# EAGLE board LEDSync (EAGLE 8.3.2)
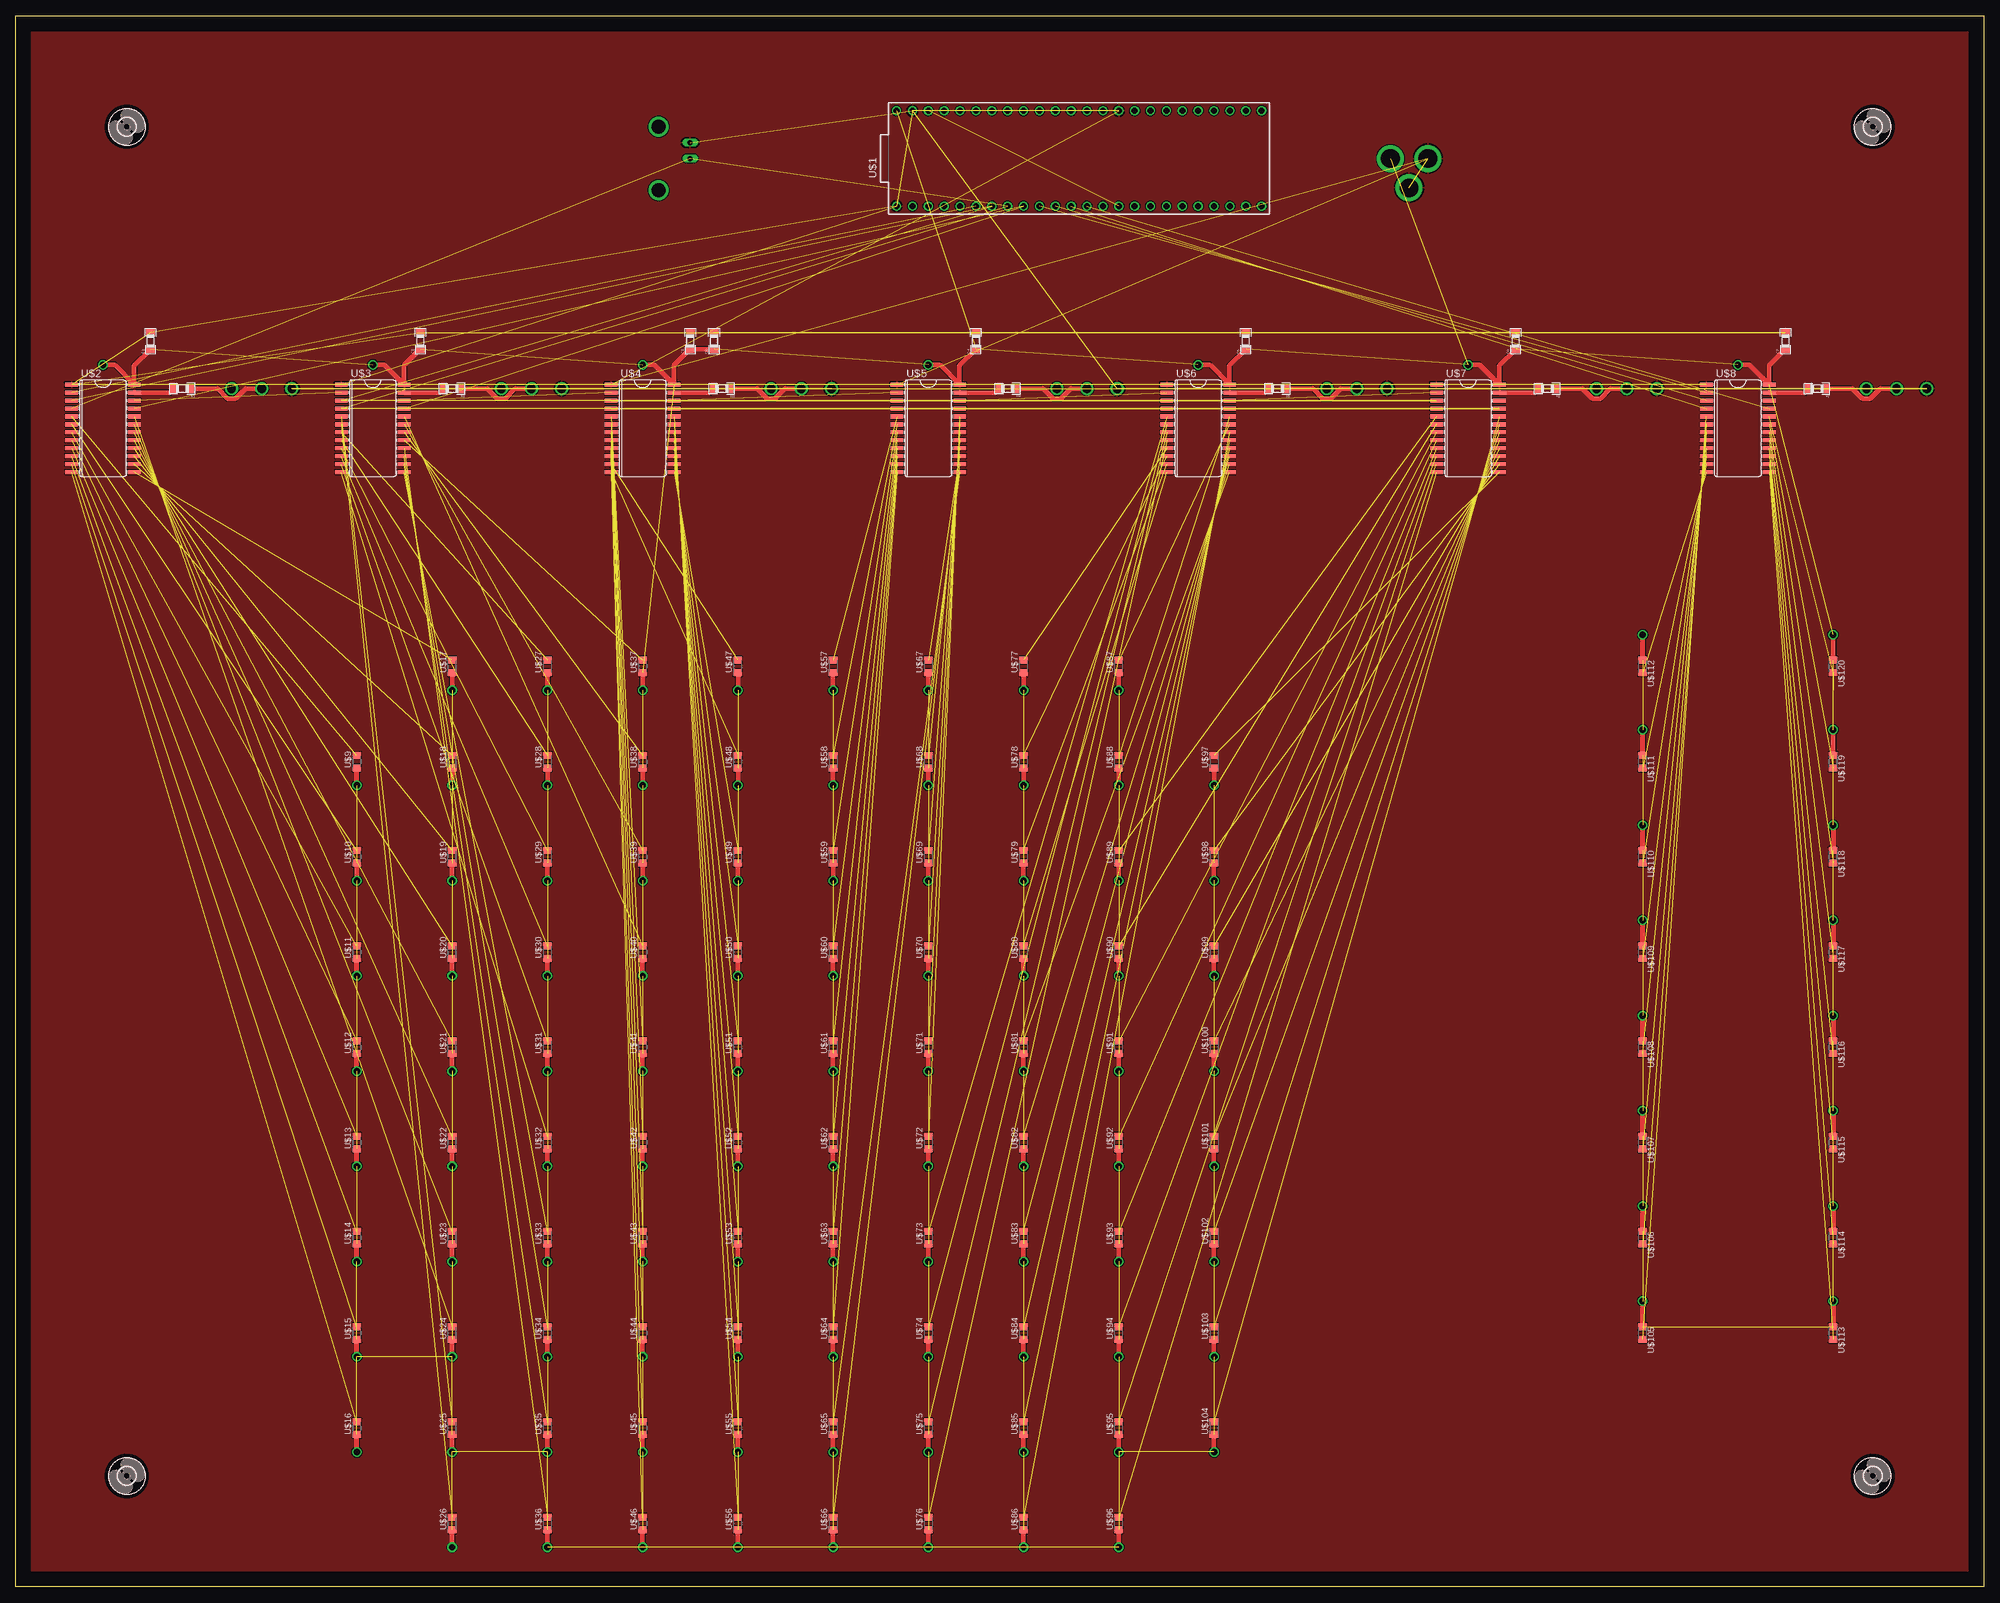
[diagram p0: board, top side]
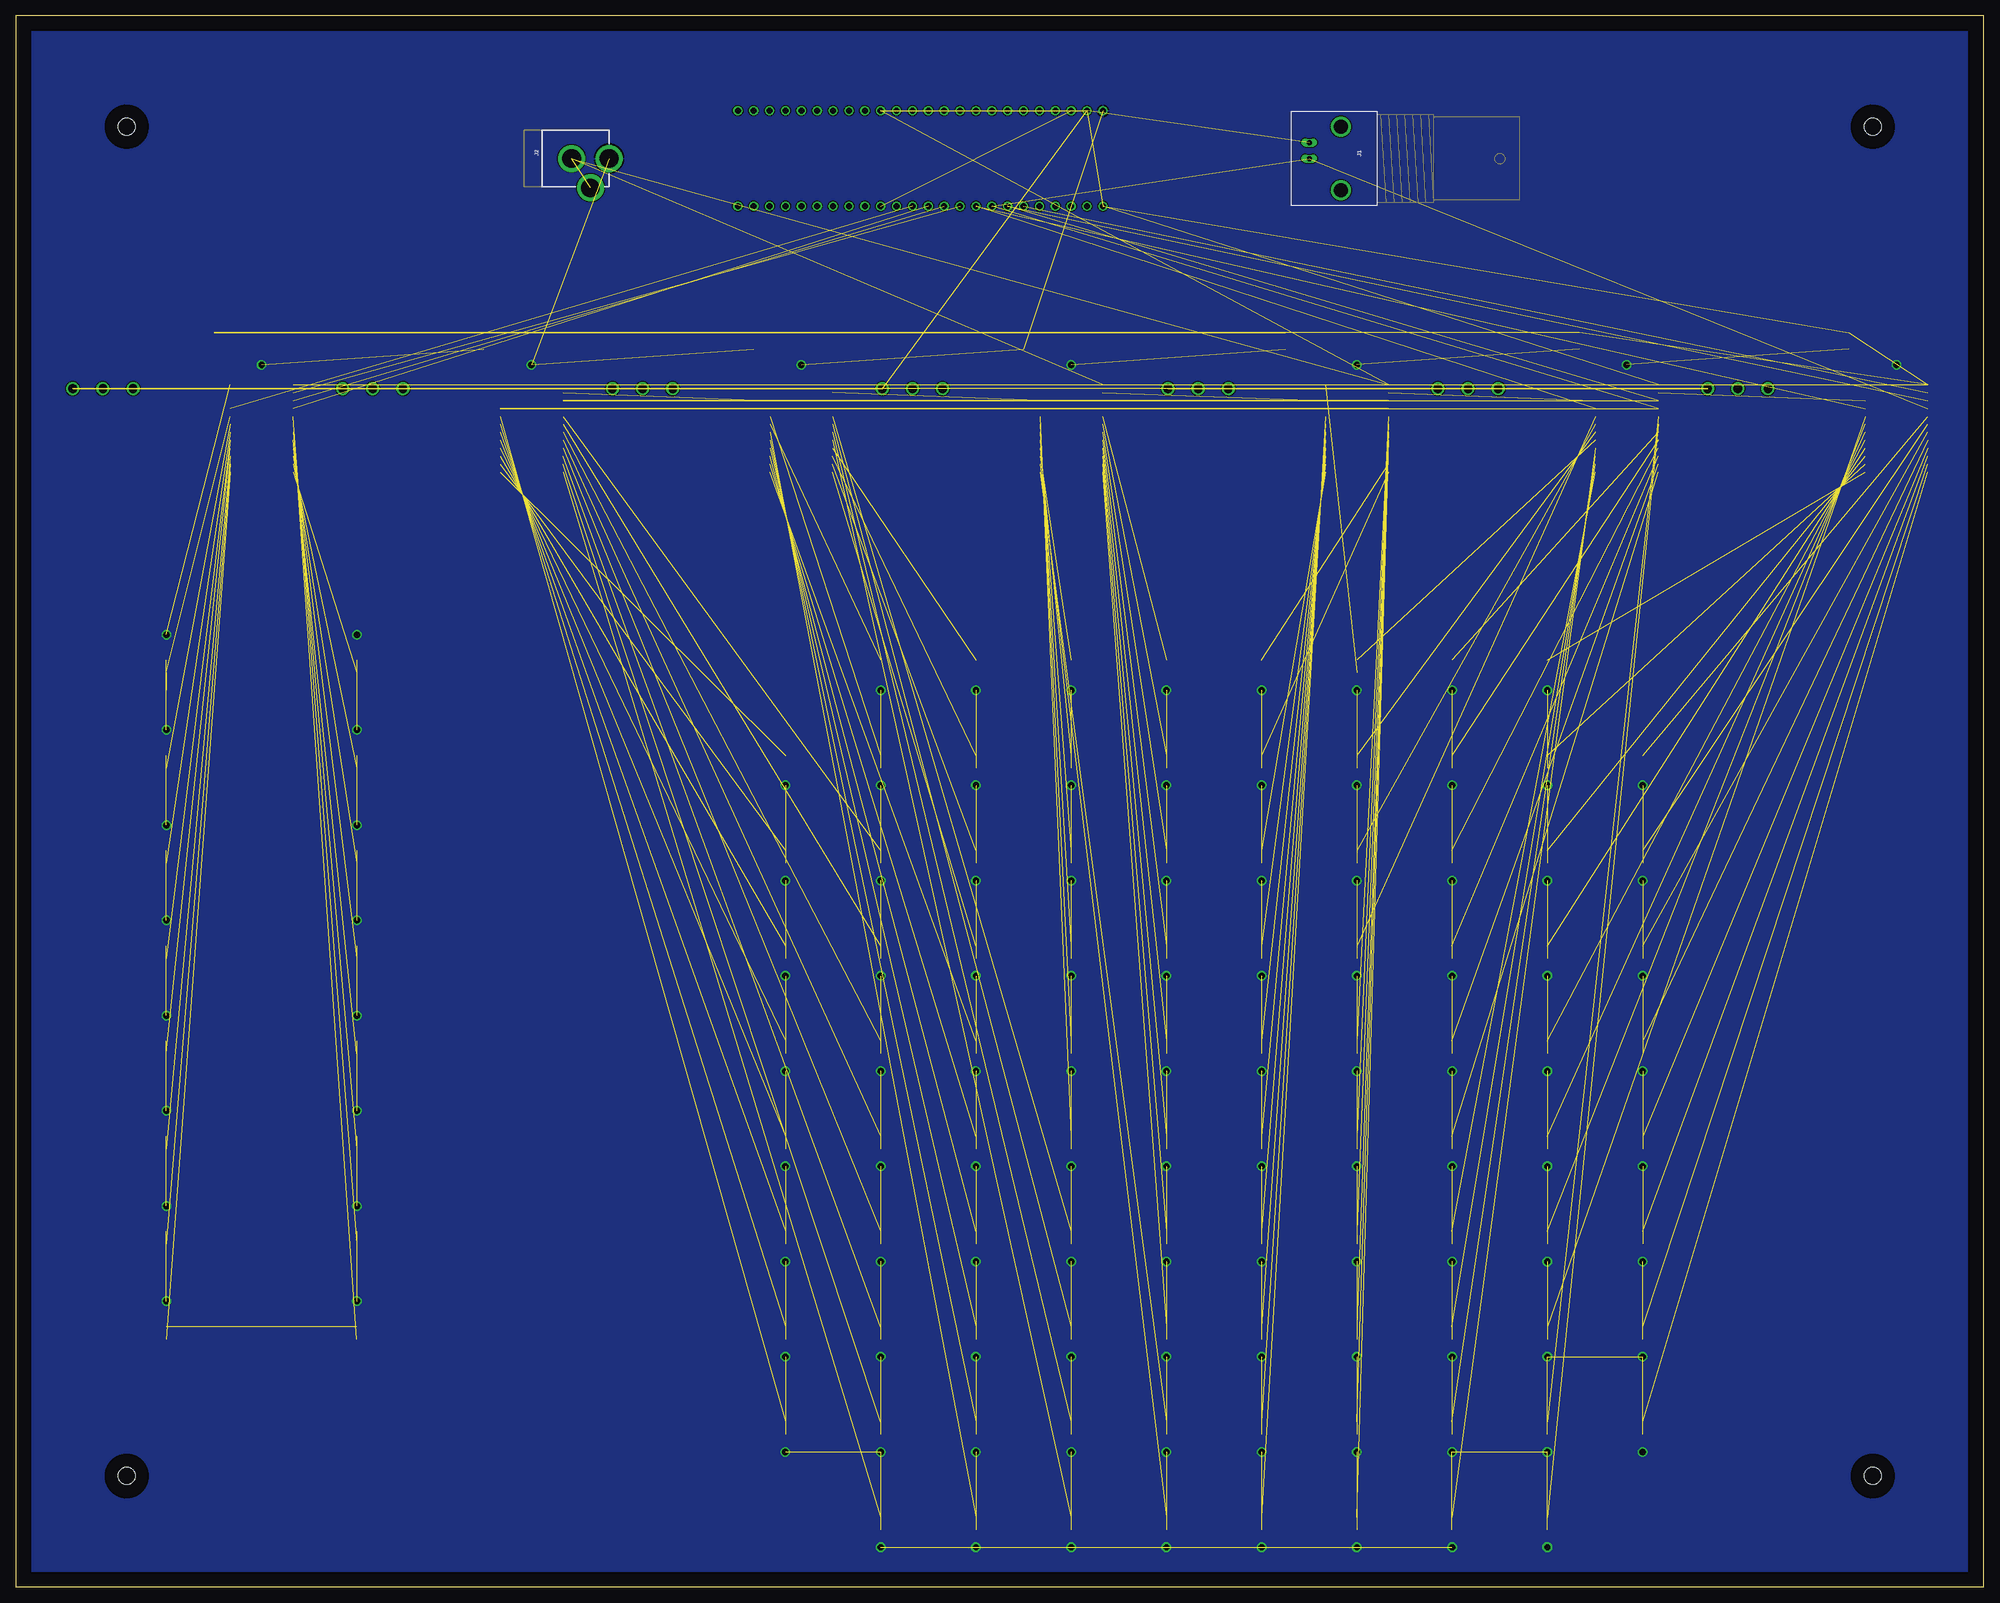
[diagram p1: board, bottom side, seen from below]

Size 314.96 x 251.46 mm. Coordinates in mm from the lower left corner, seen from the top.
Outline: 0,251.46 314.96,251.46 314.96,0 0,0 0,251.46
Copper layers (1*16): Top 0.035mm / dielectric 1.5mm / Bottom 0.035mm
Design rules "default": minimum track width 6mil, minimum drill 0.35mm, track to track 6mil, track to pad 6mil, pad to pad 6mil, via to via 6mil, smd to smd 6mil, copper to edge 40mil, drill to drill 6mil, minimum pad ring 10mil, minimum via ring 8mil, stop-mask expansion 4mil, vias tented up to drill 0mil, thermal gap 10mil

## Footprints (pad centres in the part's own frame; a part is rotated, then mirrored left to right if it is on the bottom)
0805 = smd 1.2 x 1.4: 1 -1.3,0; 2 1.3,0
2,8 = hole 2.8: 0,0
BNC = drill 2.2: 3 -5.08,5.08; 4 5.08,5.08 | drill 0.8 long: GND -2.54,0; S 0,0
POWER_JACK_PTH = drill 2.997 pad 4.318: GND 0,7.7; GNDBREAK 4.7,10.7; PWR 0,13.7
TEENSY_3.6_DIL = drill 0.965: 0 -7.62,25.4; 1 -7.62,22.86; 2 -7.62,20.32; 3 -7.62,17.78; 3.3V 7.62,22.86; 3.3V3 -7.62,-7.62; 4 -7.62,15.24; 5 -7.62,12.7; 6 -7.62,10.16; 7 -7.62,7.62; 8 -7.62,5.08; 9 -7.62,2.54; 10 -7.62,0; 11 -7.62,-2.54; 12 -7.62,-5.08; 13 7.62,-5.08; 14/A0 7.62,-2.54; 15/A1 7.62,0; 16/A2 7.62,2.54; 17/A3 7.62,5.08; 18/A4 7.62,7.62; 19/A5 7.62,10.16; 20/A6 7.62,12.7; 21/A7 7.62,15.24; 22/A8 7.62,17.78; 23/A9 7.62,20.32; 24 -7.62,-10.16; 25 -7.62,-12.7; 26 -7.62,-15.24; 27 -7.62,-17.78; 28 -7.62,-20.32; 29 -7.62,-22.86; 30 -7.62,-25.4; 31/A12 -7.62,-27.94; 32/A13 -7.62,-30.48; 33/A14 7.62,-30.48; 34/A15 7.62,-27.94; 35/A16 7.62,-25.4; 36/A17 7.62,-22.86; 37/A18 7.62,-20.32; 38/A19 7.62,-17.78; 39/A20 7.62,-15.24; A21 7.62,-12.7; A22 7.62,-10.16; AGND 7.62,25.4; GND -7.62,27.94; GND1 7.62,-7.62; VIN 7.62,27.94
SO24L = smd 0.66 x 2.032: 1 -6.985,-5.029; 2 -5.715,-5.029; 3 -4.445,-5.029; 4 -3.175,-5.029; 5 -1.905,-5.029; 6 -0.635,-5.029; 7 0.635,-5.029; 8 1.905,-5.029; 9 3.175,-5.029; 10 4.445,-5.029; 11 5.715,-5.029; 12 6.985,-5.029; 13 6.985,5.029; 14 5.715,5.029; 15 4.445,5.029; 16 3.175,5.029; 17 1.905,5.029; 18 0.635,5.029; 19 -0.635,5.029; 20 -1.905,5.029; 21 -3.175,5.029; 22 -4.445,5.029; 23 -5.715,5.029; 24 -6.985,5.029
0805' = smd 1.1 x 1.4: 1 -1,0; 2 1,0
P170N2 = drill 1.397: P$1 4.826,0; P$2 0,0; P$3 -4.826,0

## Placement (x,y rotation side)
C1  0.1uF  [0805]  21.59,199.39 90 top
C2  0.1uF  [0805]  64.77,199.39 90 top
C3  0.1uF  [0805]  107.95,199.39 90 top
C4  0.1uF  [0805]  153.67,199.39 90 top
C5  0.1uF  [0805]  196.85,199.39 90 top
C6  0.1uF  [0805]  240.03,199.39 90 top
C7  0.1uF  [0805]  283.21,199.39 90 top
C8  4.7uF  [0805]  111.76,199.39 90 top
H1  MOUNT-HOLE2.8  [2,8]  17.78,233.68 0 top
H2  MOUNT-HOLE2.8  [2,8]  297.18,233.68 0 top
H3  MOUNT-HOLE2.8  [2,8]  297.18,17.78 0 top
H4  MOUNT-HOLE2.8  [2,8]  17.78,17.78 0 top
J1  BNCPTH  [BNC]  107.95,228.6 270 bottom
J2  POWER_JACK  [POWER_JACK_PTH]  233.68,228.6 270 bottom
R1  [0805]  26.67,191.77 180 top
R2  [0805]  69.85,191.77 180 top
R3  [0805]  113.03,191.77 180 top
R4  [0805]  158.75,191.77 180 top
R5  [0805]  201.93,191.77 180 top
R6  [0805]  245.11,191.77 180 top
R7  [0805]  288.29,191.77 180 top
U$1  TEENSY_3.6_DIL  [TEENSY_3.6_DIL]  168.91,228.6 90 top
U$2  MAX6969AWG+AWG+  [SO24L]  13.97,185.42 270 top
U$3  MAX6969AWG+AWG+  [SO24L]  57.15,185.42 270 top
U$4  MAX6969AWG+AWG+  [SO24L]  100.33,185.42 270 top
U$5  MAX6969AWG+AWG+  [SO24L]  146.05,185.42 270 top
U$6  MAX6969AWG+AWG+  [SO24L]  189.23,185.42 270 top
U$7  MAX6969AWG+AWG+  [SO24L]  232.41,185.42 270 top
U$8  MAX6969AWG+AWG+  [SO24L]  275.59,185.42 270 top
U$9  LED0805  [0805']  54.61,132.08 90 top
U$10  LED0805  [0805']  54.61,116.84 90 top
U$11  LED0805  [0805']  54.61,101.6 90 top
U$12  LED0805  [0805']  54.61,86.36 90 top
U$13  LED0805  [0805']  54.61,71.12 90 top
U$14  LED0805  [0805']  54.61,55.88 90 top
U$15  LED0805  [0805']  54.61,40.64 90 top
U$16  LED0805  [0805']  54.61,25.4 90 top
U$17  LED0805  [0805']  69.85,147.32 90 top
U$18  LED0805  [0805']  69.85,132.08 90 top
U$19  LED0805  [0805']  69.85,116.84 90 top
U$20  LED0805  [0805']  69.85,101.6 90 top
U$21  LED0805  [0805']  69.85,86.36 90 top
U$22  LED0805  [0805']  69.85,71.12 90 top
U$23  LED0805  [0805']  69.85,55.88 90 top
U$24  LED0805  [0805']  69.85,40.64 90 top
U$25  LED0805  [0805']  69.85,25.4 90 top
U$26  LED0805  [0805']  69.85,10.16 90 top
U$27  LED0805  [0805']  85.09,147.32 90 top
U$28  LED0805  [0805']  85.09,132.08 90 top
U$29  LED0805  [0805']  85.09,116.84 90 top
U$30  LED0805  [0805']  85.09,101.6 90 top
U$31  LED0805  [0805']  85.09,86.36 90 top
U$32  LED0805  [0805']  85.09,71.12 90 top
U$33  LED0805  [0805']  85.09,55.88 90 top
U$34  LED0805  [0805']  85.09,40.64 90 top
U$35  LED0805  [0805']  85.09,25.4 90 top
U$36  LED0805  [0805']  85.09,10.16 90 top
U$37  LED0805  [0805']  100.33,147.32 90 top
U$38  LED0805  [0805']  100.33,132.08 90 top
U$39  LED0805  [0805']  100.33,116.84 90 top
U$40  LED0805  [0805']  100.33,101.6 90 top
U$41  LED0805  [0805']  100.33,86.36 90 top
U$42  LED0805  [0805']  100.33,71.12 90 top
U$43  LED0805  [0805']  100.33,55.88 90 top
U$44  LED0805  [0805']  100.33,40.64 90 top
U$45  LED0805  [0805']  100.33,25.4 90 top
U$46  LED0805  [0805']  100.33,10.16 90 top
U$47  LED0805  [0805']  115.57,147.32 90 top
U$48  LED0805  [0805']  115.57,132.08 90 top
U$49  LED0805  [0805']  115.57,116.84 90 top
U$50  LED0805  [0805']  115.57,101.6 90 top
U$51  LED0805  [0805']  115.57,86.36 90 top
U$52  LED0805  [0805']  115.57,71.12 90 top
U$53  LED0805  [0805']  115.57,55.88 90 top
U$54  LED0805  [0805']  115.57,40.64 90 top
U$55  LED0805  [0805']  115.57,25.4 90 top
U$56  LED0805  [0805']  115.57,10.16 90 top
U$57  LED0805  [0805']  130.81,147.32 90 top
U$58  LED0805  [0805']  130.81,132.08 90 top
U$59  LED0805  [0805']  130.81,116.84 90 top
U$60  LED0805  [0805']  130.81,101.6 90 top
U$61  LED0805  [0805']  130.81,86.36 90 top
U$62  LED0805  [0805']  130.81,71.12 90 top
U$63  LED0805  [0805']  130.81,55.88 90 top
U$64  LED0805  [0805']  130.81,40.64 90 top
U$65  LED0805  [0805']  130.81,25.4 90 top
U$66  LED0805  [0805']  130.81,10.16 90 top
U$67  LED0805  [0805']  146.05,147.32 90 top
U$68  LED0805  [0805']  146.05,132.08 90 top
U$69  LED0805  [0805']  146.05,116.84 90 top
U$70  LED0805  [0805']  146.05,101.6 90 top
U$71  LED0805  [0805']  146.05,86.36 90 top
U$72  LED0805  [0805']  146.05,71.12 90 top
U$73  LED0805  [0805']  146.05,55.88 90 top
U$74  LED0805  [0805']  146.05,40.64 90 top
U$75  LED0805  [0805']  146.05,25.4 90 top
U$76  LED0805  [0805']  146.05,10.16 90 top
U$77  LED0805  [0805']  161.29,147.32 90 top
U$78  LED0805  [0805']  161.29,132.08 90 top
U$79  LED0805  [0805']  161.29,116.84 90 top
U$80  LED0805  [0805']  161.29,101.6 90 top
U$81  LED0805  [0805']  161.29,86.36 90 top
U$82  LED0805  [0805']  161.29,71.12 90 top
U$83  LED0805  [0805']  161.29,55.88 90 top
U$84  LED0805  [0805']  161.29,40.64 90 top
U$85  LED0805  [0805']  161.29,25.4 90 top
U$86  LED0805  [0805']  161.29,10.16 90 top
U$87  LED0805  [0805']  176.53,147.32 90 top
U$88  LED0805  [0805']  176.53,132.08 90 top
U$89  LED0805  [0805']  176.53,116.84 90 top
U$90  LED0805  [0805']  176.53,101.6 90 top
U$91  LED0805  [0805']  176.53,86.36 90 top
U$92  LED0805  [0805']  176.53,71.12 90 top
U$93  LED0805  [0805']  176.53,55.88 90 top
U$94  LED0805  [0805']  176.53,40.64 90 top
U$95  LED0805  [0805']  176.53,25.4 90 top
U$96  LED0805  [0805']  176.53,10.16 90 top
U$97  LED0805  [0805']  191.77,132.08 90 top
U$98  LED0805  [0805']  191.77,116.84 90 top
U$99  LED0805  [0805']  191.77,101.6 90 top
U$100  LED0805  [0805']  191.77,86.36 90 top
U$101  LED0805  [0805']  191.77,71.12 90 top
U$102  LED0805  [0805']  191.77,55.88 90 top
U$103  LED0805  [0805']  191.77,40.64 90 top
U$104  LED0805  [0805']  191.77,25.4 90 top
U$105  LED0805  [0805']  260.35,40.64 270 top
U$106  LED0805  [0805']  260.35,55.88 270 top
U$107  LED0805  [0805']  260.35,71.12 270 top
U$108  LED0805  [0805']  260.35,86.36 270 top
U$109  LED0805  [0805']  260.35,101.6 270 top
U$110  LED0805  [0805']  260.35,116.84 270 top
U$111  LED0805  [0805']  260.35,132.08 270 top
U$112  LED0805  [0805']  260.35,147.32 270 top
U$113  LED0805  [0805']  290.83,40.64 270 top
U$114  LED0805  [0805']  290.83,55.88 270 top
U$115  LED0805  [0805']  290.83,71.12 270 top
U$116  LED0805  [0805']  290.83,86.36 270 top
U$117  LED0805  [0805']  290.83,101.6 270 top
U$118  LED0805  [0805']  290.83,116.84 270 top
U$119  LED0805  [0805']  290.83,132.08 270 top
U$120  LED0805  [0805']  290.83,147.32 270 top
U$121  P170N2  [P170N2]  39.37,191.77 180 top
U$122  P170N2  [P170N2]  82.55,191.77 180 top
U$123  P170N2  [P170N2]  125.73,191.77 180 top
U$124  P170N2  [P170N2]  171.45,191.77 180 top
U$125  P170N2  [P170N2]  214.63,191.77 180 top
U$126  P170N2  [P170N2]  257.81,191.77 180 top
U$127  P170N2  [P170N2]  300.99,191.77 180 top

## Library data of the parts
C1-C8 R1-R7 = standardparts
H1-H4 = holes
J1 = SparkFun-Connectors; PROD_ID: LPA-12729; SF_ID: PRT-10550
J2 = SparkFun-Connectors; PROD_ID: CONN-08197
U$1-U$127 = radu-eagle-lib

## Nets
3V3: U$1.3.3V U$1.3.3V3
G_CLK: U$1.5 U$2.3 U$3.3 U$4.3 U$5.3 U$6.3 U$7.3
G_D: U$1.4 U$2.2
G_LE: J1.S U$1.6 U$2.4 U$3.4 U$4.4 U$5.4 U$6.4 U$7.4
G_OE: U$1.7 U$2.21 U$3.21 U$4.21 U$5.21 U$6.21 U$7.21
GND: C1.2 C2.2 C3.2 C4.2 C5.2 C6.2 C7.2 C8.2 J1.GND J2.GND J2.GNDBREAK U$1.AGND U$1.GND U$1.GND1 U$2.1 U$3.1 U$4.1 U$5.1 U$6.1 U$7.1 U$8.1 U$121.P$3 U$122.P$3 U$123.P$3 U$124.P$3 U$125.P$3 U$126.P$3 U$127.P$3
N$1: U$2.5 U$9.2
N$2: U$2.6 U$10.2
N$3: U$2.7 U$11.2
N$4: U$2.8 U$12.2
N$5: U$2.9 U$13.2
N$6: U$2.10 U$14.2
N$7: U$2.11 U$15.2
N$8: U$2.12 U$16.2
N$9: U$2.13 U$17.2
N$10: U$2.14 U$18.2
N$11: U$2.15 U$19.2
N$12: U$2.16 U$20.2
N$13: U$2.17 U$21.2
N$14: U$2.18 U$22.2
N$15: U$2.19 U$23.2
N$16: U$2.20 U$24.2
N$17: U$3.5 U$25.2
N$18: U$3.6 U$26.2
N$19: U$3.7 U$27.2
N$20: U$3.8 U$28.2
N$21: U$3.9 U$29.2
N$22: U$3.10 U$30.2
N$23: U$3.11 U$31.2
N$24: U$3.12 U$32.2
N$25: U$3.13 U$33.2
N$26: U$3.14 U$34.2
N$27: U$3.15 U$35.2
N$28: U$3.16 U$36.2
N$29: U$3.17 U$37.2
N$30: U$3.18 U$38.2
N$31: U$3.19 U$39.2
N$32: U$3.20 U$40.2
N$33: U$4.5 U$41.2
N$34: U$4.6 U$42.2
N$35: U$4.7 U$43.2
N$36: U$4.8 U$44.2
N$37: U$4.9 U$45.2
N$38: U$4.10 U$46.2
N$39: U$4.11 U$47.2
N$40: U$4.12 U$48.2
N$41: U$4.13 U$49.2
N$42: U$4.14 U$50.2
N$43: U$4.15 U$51.2
N$44: U$4.16 U$52.2
N$45: U$4.17 U$53.2
N$46: U$4.18 U$54.2
N$47: U$4.19 U$55.2
N$48: U$4.20 U$56.2
N$49: U$5.5 U$57.2
N$50: U$5.6 U$58.2
N$51: U$5.7 U$59.2
N$52: U$5.8 U$60.2
N$53: U$5.9 U$61.2
N$54: U$5.10 U$62.2
N$55: U$5.11 U$63.2
N$56: U$5.12 U$64.2
N$57: U$5.13 U$65.2
N$58: U$5.14 U$66.2
N$59: U$5.15 U$67.2
N$60: U$5.16 U$68.2
N$61: U$5.17 U$69.2
N$62: U$5.18 U$70.2
N$63: U$5.19 U$71.2
N$64: U$5.20 U$72.2
N$65: U$6.5 U$73.2
N$66: U$6.6 U$74.2
N$67: U$6.7 U$75.2
N$68: U$6.8 U$76.2
N$69: U$6.9 U$77.2
N$70: U$6.10 U$78.2
N$71: U$6.11 U$79.2
N$72: U$6.12 U$80.2
N$73: U$6.13 U$81.2
N$74: U$6.14 U$82.2
N$75: U$6.15 U$83.2
N$76: U$6.16 U$84.2
N$77: U$6.17 U$85.2
N$78: U$6.18 U$86.2
N$79: U$6.19 U$87.2
N$80: U$6.20 U$88.2
N$81: U$7.5 U$89.2
N$82: U$7.6 U$90.2
N$83: U$7.7 U$91.2
N$84: U$7.8 U$92.2
N$85: U$7.9 U$93.2
N$86: U$7.10 U$94.2
N$87: U$7.11 U$95.2
N$88: U$7.12 U$96.2
N$89: U$7.13 U$97.2
N$90: U$7.14 U$98.2
N$91: U$7.16 U$100.2
N$92: U$7.17 U$101.2
N$93: U$7.18 U$102.2
N$94: U$7.19 U$103.2
N$95: U$7.20 U$104.2
N$96: U$8.5 U$105.2
N$97: U$8.6 U$106.2
N$98: U$8.7 U$107.2
N$99: U$8.8 U$108.2
N$100: U$8.10 U$110.2
N$101: U$8.11 U$111.2
N$102: U$8.12 U$112.2
N$103: U$8.13 U$113.2
N$104: U$8.14 U$114.2
N$105: U$8.15 U$115.2
N$106: U$8.16 U$116.2
N$107: U$8.17 U$117.2
N$108: U$8.18 U$118.2
N$109: U$8.19 U$119.2
N$110: U$8.20 U$120.2
N$111: U$8.9 U$109.2
N$112: U$7.15 U$99.2
N$116: R1.2 U$2.23
N$117: R2.2 U$3.23
N$118: R3.2 U$4.23
N$119: R4.2 U$5.23
N$120: R5.2 U$6.23
N$125: R6.2 U$7.23
N$126: R7.2 U$8.23
N$127: R7.1 U$127.P$2
N$128: U$2.22 U$3.2
N$130: R1.1 U$121.P$2
N$132: R2.1 U$122.P$2
N$134: R3.1 U$123.P$2
N$136: R6.1 U$126.P$2
N$138: R5.1 U$125.P$2
N$140: R4.1 U$124.P$2
N$146: U$3.22 U$4.2
N$147: U$4.22 U$5.2
N$148: U$5.22 U$6.2
N$149: U$6.22 U$7.2
T_CLK: U$1.9 U$8.3
T_D: U$1.8 U$8.2
T_LE: U$1.10 U$8.4
T_OE: U$1.11 U$8.21
VIN: C1.1 C2.1 C3.1 C4.1 C5.1 C6.1 C7.1 C8.1 J2.PWR U$1.VIN U$2.24 U$3.24 U$4.24 U$5.24 U$6.24 U$7.24 U$8.24 U$9.1 U$10.1 U$11.1 U$12.1 U$13.1 U$14.1 U$15.1 U$16.1 U$17.1 U$18.1 U$19.1 U$20.1 U$21.1 U$22.1 U$23.1 U$24.1 U$25.1 U$26.1 U$27.1 U$28.1 U$29.1 U$30.1 U$31.1 U$32.1 U$33.1 U$34.1 U$35.1 U$36.1 U$37.1 U$38.1 U$39.1 U$40.1 U$41.1 U$42.1 U$43.1 U$44.1 U$45.1 U$46.1 U$47.1 U$48.1 U$49.1 U$50.1 U$51.1 U$52.1 U$53.1 U$54.1 U$55.1 U$56.1 U$57.1 U$58.1 U$59.1 U$60.1 U$61.1 U$62.1 U$63.1 U$64.1 U$65.1 U$66.1 U$67.1 U$68.1 U$69.1 U$70.1 U$71.1 U$72.1 U$73.1 U$74.1 U$75.1 U$76.1 U$77.1 U$78.1 U$79.1 U$80.1 U$81.1 U$82.1 U$83.1 U$84.1 U$85.1 U$86.1 U$87.1 U$88.1 U$89.1 U$90.1 U$91.1 U$92.1 U$93.1 U$94.1 U$95.1 U$96.1 U$97.1 U$98.1 U$99.1 U$100.1 U$101.1 U$102.1 U$103.1 U$104.1 U$105.1 U$106.1 U$107.1 U$108.1 U$109.1 U$110.1 U$111.1 U$112.1 U$113.1 U$114.1 U$115.1 U$116.1 U$117.1 U$118.1 U$119.1 U$120.1

## Tracks (layer width: path | path; a pad name or v marks a point on that pad's centre or on a via)
3V3  (1 unrouted)
G_CLK  (6 unrouted)
G_D  (1 unrouted)
G_LE  (7 unrouted)
G_OE  (6 unrouted)
GND  (27 unrouted)
  pour Top: 2.54,248.92 312.42,248.92 312.42,2.54 2.54,2.54
N$1  (1 unrouted)
N$2  (1 unrouted)
N$3  (1 unrouted)
N$4  (1 unrouted)
N$5  (1 unrouted)
N$6  (1 unrouted)
N$7  (1 unrouted)
N$8  (1 unrouted)
N$9  (1 unrouted)
N$10  (1 unrouted)
N$11  (1 unrouted)
N$12  (1 unrouted)
N$13  (1 unrouted)
N$14  (1 unrouted)
N$15  (1 unrouted)
N$16  (1 unrouted)
N$17  (1 unrouted)
N$18  (1 unrouted)
N$19  (1 unrouted)
N$20  (1 unrouted)
N$21  (1 unrouted)
N$22  (1 unrouted)
N$23  (1 unrouted)
N$24  (1 unrouted)
N$25  (1 unrouted)
N$26  (1 unrouted)
N$27  (1 unrouted)
N$28  (1 unrouted)
N$29  (1 unrouted)
N$30  (1 unrouted)
N$31  (1 unrouted)
N$32  (1 unrouted)
N$33  (1 unrouted)
N$34  (1 unrouted)
N$35  (1 unrouted)
N$36  (1 unrouted)
N$37  (1 unrouted)
N$38  (1 unrouted)
N$39  (1 unrouted)
N$40  (1 unrouted)
N$41  (1 unrouted)
N$42  (1 unrouted)
N$43  (1 unrouted)
N$44  (1 unrouted)
N$45  (1 unrouted)
N$46  (1 unrouted)
N$47  (1 unrouted)
N$48  (1 unrouted)
N$49  (1 unrouted)
N$50  (1 unrouted)
N$51  (1 unrouted)
N$52  (1 unrouted)
N$53  (1 unrouted)
N$54  (1 unrouted)
N$55  (1 unrouted)
N$56  (1 unrouted)
N$57  (1 unrouted)
N$58  (1 unrouted)
N$59  (1 unrouted)
N$60  (1 unrouted)
N$61  (1 unrouted)
N$62  (1 unrouted)
N$63  (1 unrouted)
N$64  (1 unrouted)
N$65  (1 unrouted)
N$66  (1 unrouted)
N$67  (1 unrouted)
N$68  (1 unrouted)
N$69  (1 unrouted)
N$70  (1 unrouted)
N$71  (1 unrouted)
N$72  (1 unrouted)
N$73  (1 unrouted)
N$74  (1 unrouted)
N$75  (1 unrouted)
N$76  (1 unrouted)
N$77  (1 unrouted)
N$78  (1 unrouted)
N$79  (1 unrouted)
N$80  (1 unrouted)
N$81  (1 unrouted)
N$82  (1 unrouted)
N$83  (1 unrouted)
N$84  (1 unrouted)
N$85  (1 unrouted)
N$86  (1 unrouted)
N$87  (1 unrouted)
N$88  (1 unrouted)
N$89  (1 unrouted)
N$90  (1 unrouted)
N$91  (1 unrouted)
N$92  (1 unrouted)
N$93  (1 unrouted)
N$94  (1 unrouted)
N$95  (1 unrouted)
N$96  (1 unrouted)
N$97  (1 unrouted)
N$98  (1 unrouted)
N$99  (1 unrouted)
N$100  (1 unrouted)
N$101  (1 unrouted)
N$102  (1 unrouted)
N$103  (1 unrouted)
N$104  (1 unrouted)
N$105  (1 unrouted)
N$106  (1 unrouted)
N$107  (1 unrouted)
N$108  (1 unrouted)
N$109  (1 unrouted)
N$110  (2 unrouted)
N$111  (1 unrouted)
N$112  (1 unrouted)
N$116
  Top 0.762: U$2.23 24.73,191.13 R1.2
N$117
  Top 0.762: U$3.23 67.91,191.13 R2.2
N$118
  Top 0.762: U$4.23 111.09,191.13 R3.2
N$119
  Top 0.762: U$5.23 156.81,191.13 R4.2
N$120
  Top 0.762: U$6.23 200,191.13 R5.2
N$125
  Top 0.762: U$7.23 243.18,191.13 R6.2
N$126
  Top 0.762: U$8.23 286.36,191.13 R7.2
N$127
  Top 0.762: R7.1 293.93,191.77 295.51,190.19 296.82,190.19 298.4,191.77 U$127.P$2
N$128  (1 unrouted)
N$130
  Top 0.762: R1.1 32.31,191.77 33.89,190.19 35.2,190.19 36.78,191.77 U$121.P$2
N$132
  Top 0.762: R2.1 75.49,191.77 77.07,190.19 78.38,190.19 79.96,191.77 U$122.P$2
N$134
  Top 0.762: R3.1 118.67,191.77 120.25,190.19 121.56,190.19 123.14,191.77 U$123.P$2
N$136
  Top 0.762: R6.1 250.75,191.77 252.33,190.19 253.64,190.19 255.22,191.77 U$126.P$2
N$138
  Top 0.762: R5.1 207.57,191.77 209.15,190.19 210.46,190.19 212.04,191.77 U$125.P$2
N$140
  Top 0.762: R4.1 164.39,191.77 165.97,190.19 167.28,190.19 168.86,191.77 U$124.P$2
N$146  (1 unrouted)
N$147  (1 unrouted)
N$148  (1 unrouted)
N$149  (1 unrouted)
T_CLK  (1 unrouted)
T_D  (1 unrouted)
T_LE  (1 unrouted)
T_OE  (1 unrouted)
VIN  (via drill 1.02 pad 1.3)  (120 unrouted)
  Top 0.762: v54.61,128.27 U$9.1 | U$18.1 v69.85,128.27 | U$17.1 v69.85,143.51 | v85.09,143.51 U$27.1 | U$37.1 v100.33,143.51 | U$47.1 v115.57,143.51 | U$48.1 v115.57,128.27 | U$38.1 v100.33,128.27 | U$28.1 v85.09,128.27 | U$10.1 v54.61,113.03 | v69.85,113.03 U$19.1 | v85.09,113.03 U$29.1 | U$39.1 v100.33,113.03 | v115.57,113.03 U$49.1 | U$59.1 v130.81,113.03 | v130.81,128.27 U$58.1 | v130.81,143.51 U$57.1 | v146.05,143.51 U$67.1 | U$77.1 v161.29,143.51 | v176.53,143.51 U$87.1 | U$97.1 v191.77,128.27 | v176.53,128.27 U$88.1 | U$78.1 v161.29,128.27 | v146.05,128.27 U$68.1 | v191.77,113.03 U$98.1 | v176.53,113.03 U$89.1 | v161.29,113.03 U$79.1 | v146.05,113.03 U$69.1 | v191.77,97.79 U$99.1 | v176.53,97.79 U$90.1 | v161.29,97.79 U$80.1 | v146.05,97.79 U$70.1 | v130.81,97.79 U$60.1 | v115.57,97.79 U$50.1 | v100.33,97.79 U$40.1 | v85.09,97.79 U$30.1 | v54.61,97.79 U$11.1 | v69.85,97.79 U$20.1 | v54.61,82.55 U$12.1 | v54.61,67.31 U$13.1 | v54.61,52.07 U$14.1 | v69.85,52.07 U$23.1 | v69.85,67.31 U$22.1 | v69.85,82.55 U$21.1 | v85.09,82.55 U$31.1 | v85.09,67.31 U$32.1 | v85.09,52.07 U$33.1 | v100.33,52.07 U$43.1 | v100.33,67.31 U$42.1 | v100.33,82.55 U$41.1 | v115.57,82.55 U$51.1 | v130.81,82.55 U$61.1 | v146.05,82.55 U$71.1 | v161.29,82.55 U$81.1 | v161.29,67.31 U$82.1 | v161.29,52.07 U$83.1 | v146.05,52.07 U$73.1 | v130.81,52.07 U$63.1 | v115.57,52.07 U$53.1 | v176.53,82.55 U$91.1 | v191.77,82.55 U$100.1 | v191.77,67.31 U$101.1 | v176.53,67.31 U$92.1 | v191.77,52.07 U$102.1 | v176.53,52.07 U$93.1 | v191.77,21.59 U$104.1 | v191.77,36.83 U$103.1 | v176.53,36.83 U$94.1 | v176.53,21.59 U$95.1 | v176.53,6.35 U$96.1 | v161.29,6.35 U$86.1 | v161.29,21.59 U$85.1 | v161.29,36.83 U$84.1 | v146.05,36.83 U$74.1 | v146.05,21.59 U$75.1
  Top 0.762: v146.05,6.35 U$76.1 | v130.81,6.35 U$66.1 | v130.81,21.59 U$65.1 | v130.81,36.83 U$64.1 | v115.57,36.83 U$54.1 | v115.57,21.59 U$55.1 | v115.57,6.35 U$56.1 | v100.33,6.35 U$46.1 | v100.33,21.59 U$45.1 | v100.33,36.83 U$44.1 | v85.09,36.83 U$34.1 | v85.09,21.59 U$35.1 | v85.09,6.35 U$36.1 | v69.85,6.35 U$26.1 | v69.85,21.59 U$25.1 | v54.61,21.59 U$16.1 | v54.61,36.83 U$15.1 | v69.85,36.83 U$24.1 | v115.57,67.31 U$52.1 | v130.81,67.31 U$62.1 | v146.05,67.31 U$72.1 | U$105.1 v260.35,45.72 | U$106.1 v260.35,60.96 | U$107.1 v260.35,76.2 | U$108.1 v260.35,91.44 | U$109.1 v260.35,106.68 | U$110.1 v260.35,121.92 | U$111.1 v260.35,137.16 | U$112.1 v260.35,152.4 | U$120.1 v290.83,152.4 | U$119.1 v290.83,137.16 | v290.83,121.92 U$118.1 | v290.83,106.68 U$117.1 | v290.83,91.44 U$116.1 | v290.83,76.2 U$115.1 | v290.83,60.96 U$114.1 | v290.83,45.72 U$113.1 | v275.59,195.58 277.44,195.58 U$8.24 280.62,195.5 C7.1 | v232.41,195.58 234.26,195.58 U$7.24 237.44,195.5 C6.1 | v189.23,195.58 191.08,195.58 U$6.24 194.26,195.5 C5.1 | v146.05,195.58 147.9,195.58 U$5.24 151.08,195.5 C4.1 | v100.33,195.58 102.18,195.58 U$4.24 105.36,195.5 C3.1 C8.1 | v57.15,195.58 59,195.58 U$3.24 62.18,195.5 C2.1 | v13.97,195.58 15.82,195.58 U$2.24 19,195.5 C1.1
  pour Bottom: 2.54,248.92 312.42,248.92 312.42,2.54 2.54,2.54